# EAGLE board Shutter Sensors Not Good (EAGLE 9.0.1)
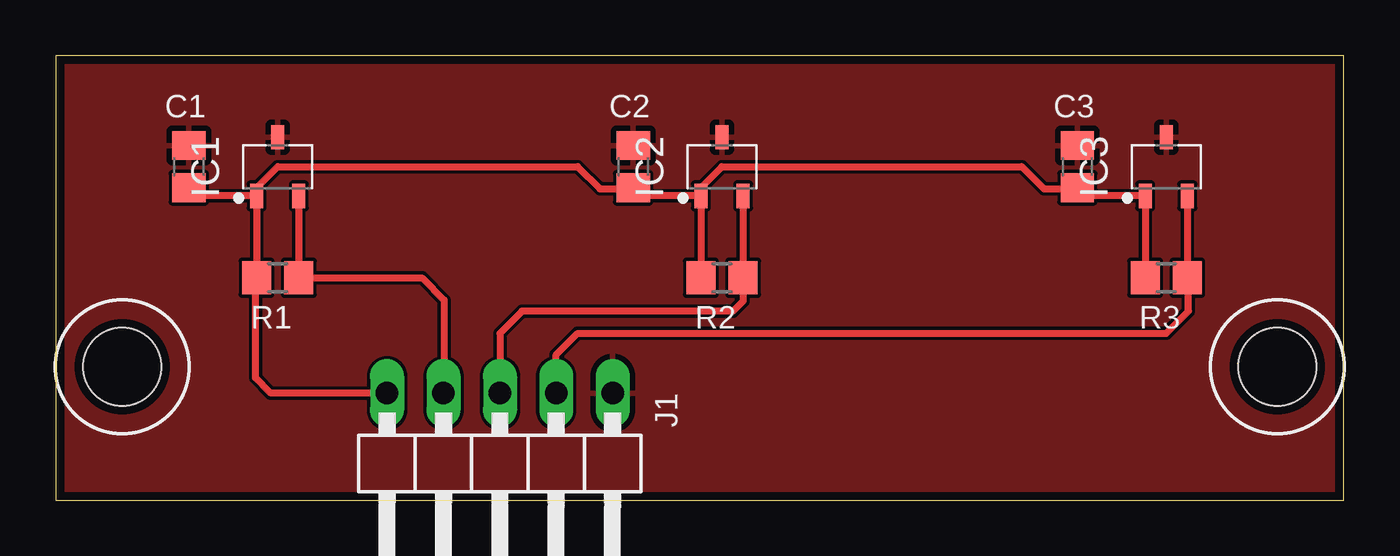
[diagram p0: board, top side]
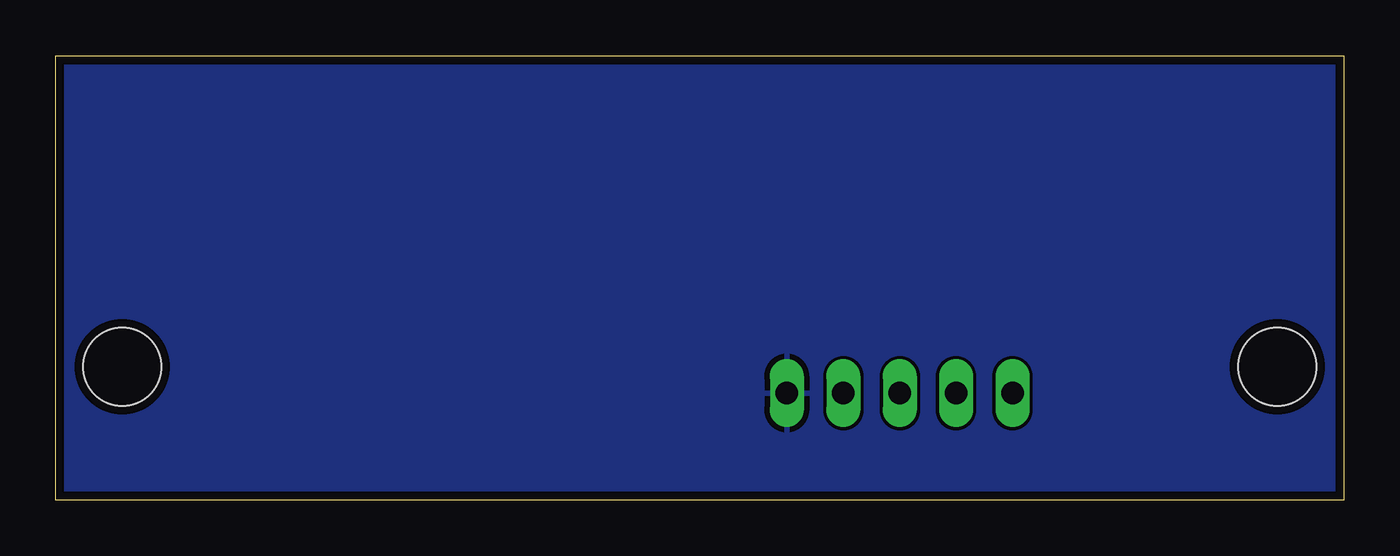
[diagram p1: board, bottom side, seen from below]

Size 58 x 20 mm. Coordinates in mm from the lower left corner, seen from the top.
Outline: 0,0 58,0 58,20 0,20 0,0
Copper layers (1*16): Top 0.035559375mm / dielectric 1.6mm / Bottom 0.035559375mm
Design rules "oshpark-2layer": minimum track width 6mil, minimum drill 10mil, track to track 6mil, track to pad 6mil, pad to pad 6mil, via to via 6mil, smd to smd 6mil, copper to edge 15mil, drill to drill 6mil, minimum pad ring 5mil, minimum via ring 5mil, stop-mask expansion 2.5mil, vias tented up to drill 0mil, thermal gap 10mil
Net classes: 1 std: width 0.3 mm, drill 0.35 mm, clearance 0.3 mm
Holes 3.5 mm at 3,6 55,6

## Footprints (pad centres in the part's own frame; a part is rotated, then mirrored left to right if it is on the bottom)
C0805 = smd 1.3 x 1.5: 1 -0.95,0; 2 0.95,0
SOT95P285X113-3 = smd 1.083 x 0.589: 1 -1.319,0.95; 2 -1.319,-0.95; 3 1.319,0
1X05/90 = drill 1.016 long: 1 -5.08,-3.81; 2 -2.54,-3.81; 3 0,-3.81; 4 2.54,-3.81; 5 5.08,-3.81
R0805 = smd 1.3 x 1.5: 1 -0.95,0; 2 0.95,0

## Placement (x,y rotation side)
C1  0.1uF  [C0805]  6,15 90 top
C2  0.1uF  [C0805]  26,15 90 top
C3  0.1uF  [C0805]  46,15 90 top
IC1  A1121  [SOT95P285X113-3]  10,15 90 top
IC2  A1121  [SOT95P285X113-3]  30,15 90 top
IC3  A1121  [SOT95P285X113-3]  50,15 90 top
J1  [1X05/90]  20,1 180 top
R1  10K  [R0805]  10,10 180 top
R2  10K  [R0805]  30,10 180 top
R3  10K  [R0805]  50,10 180 top

## Library data of the parts
C1-C3 = AUmlib; SPICEPREFIX: C
IC1-IC3 J1 = AUmlib
R1-R3 = AUmlib; SPICEPREFIX: R

## Nets
GND: C1.2 C2.2 C3.2 IC1.3 IC2.3 IC3.3 J1.1
N$1: IC2.2 J1.3 R2.1
N$2: IC1.2 J1.4 R1.1
N$9: IC3.2 J1.2 R3.1
VCC: C1.1 C2.1 C3.1 IC1.1 IC2.1 IC3.1 J1.5 R1.2 R2.2 R3.2

## Tracks (layer width: path | path; a pad name or v marks a point on that pad's centre or on a via)
GND
  pour Top: 0,0 0,20 58,20 58,0
  pour Bottom: 0,0 0,20 58,20 58,0
N$1
  Top 0.305: IC2.2 R2.1 30.95,8.95 30.5,8.5 21,8.5 20,7.5 J1.3
N$2
  Top 0.305: IC1.2 R1.1 16.5,10 17.5,9 17.5,4.85 J1.4
N$9
  Top 0.305: IC3.2 R3.1 51,9.95 51,8.5 50,7.5 23.5,7.5 22.54,6.54 J1.2
VCC
  Top 0.305: IC1.1 R1.2 9,9.95 9,5.5 9.69,4.81 J1.5 | IC1.1 6.37,13.68 C1.1 | IC1.1 9.05,14.05 10,15 23.5,15 24.5,14 25.95,14 | 25.95,14 C2.1 | IC2.1 26.27,13.68 25.95,14 | IC2.1 29.05,14.05 30,15 43.5,15 44.5,14 45.95,14 | 45.95,14 C3.1 | 45.95,14 46.27,13.68 IC3.1 R3.2 | IC2.1 R2.2